# EAGLE board rele (EAGLE 5.06)
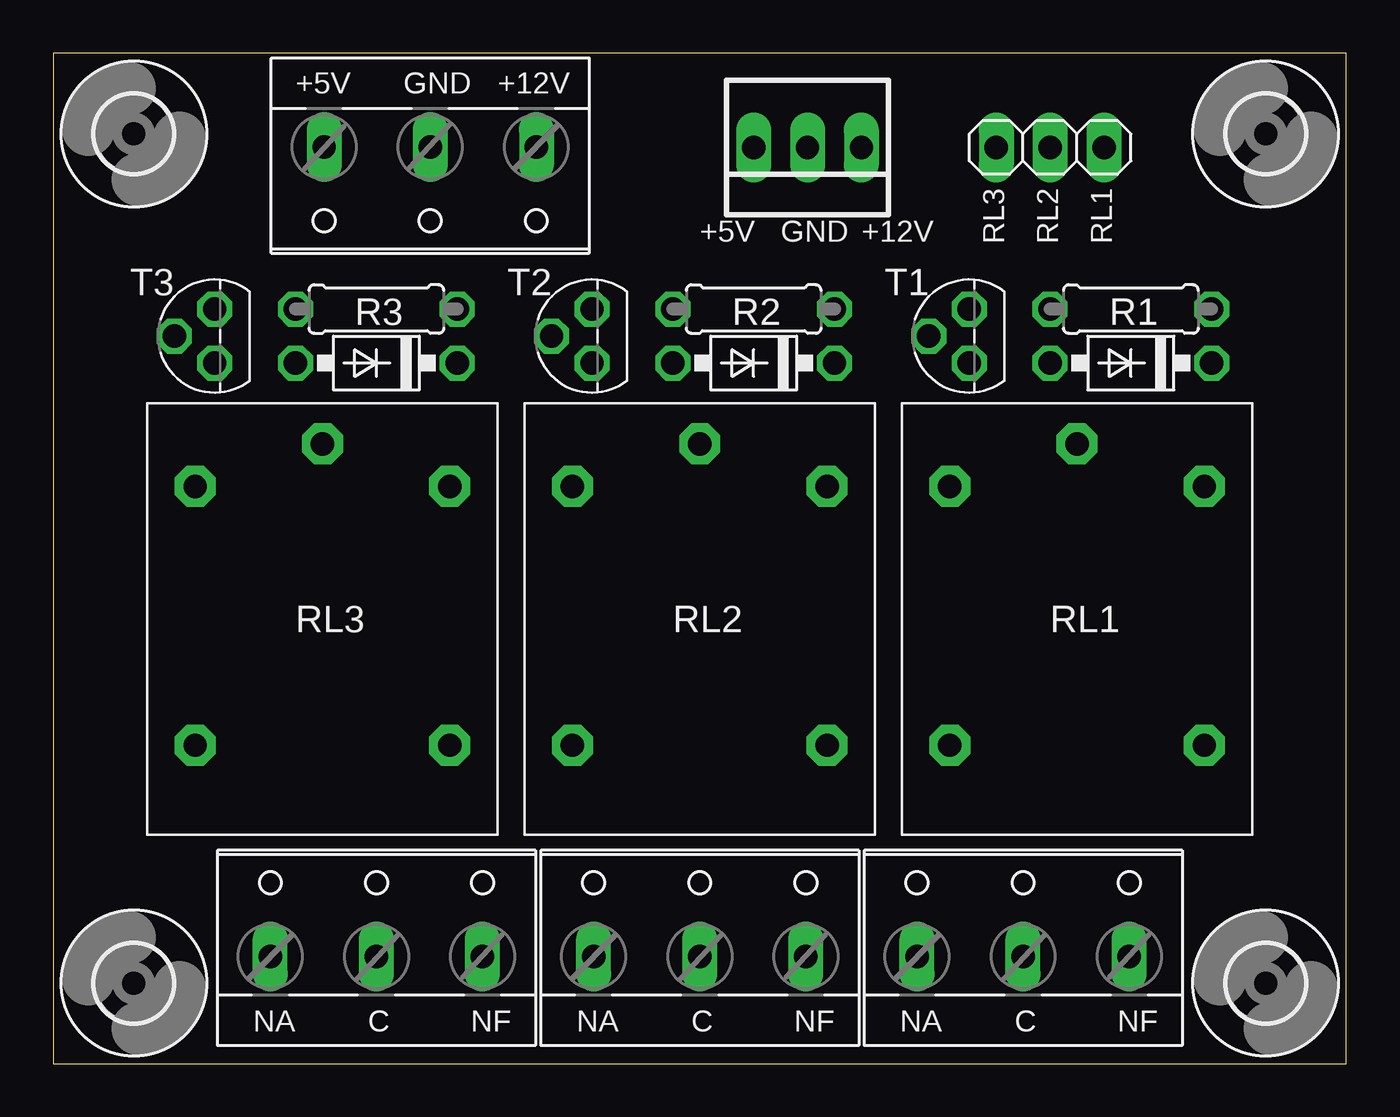
[diagram p0: board, top side]
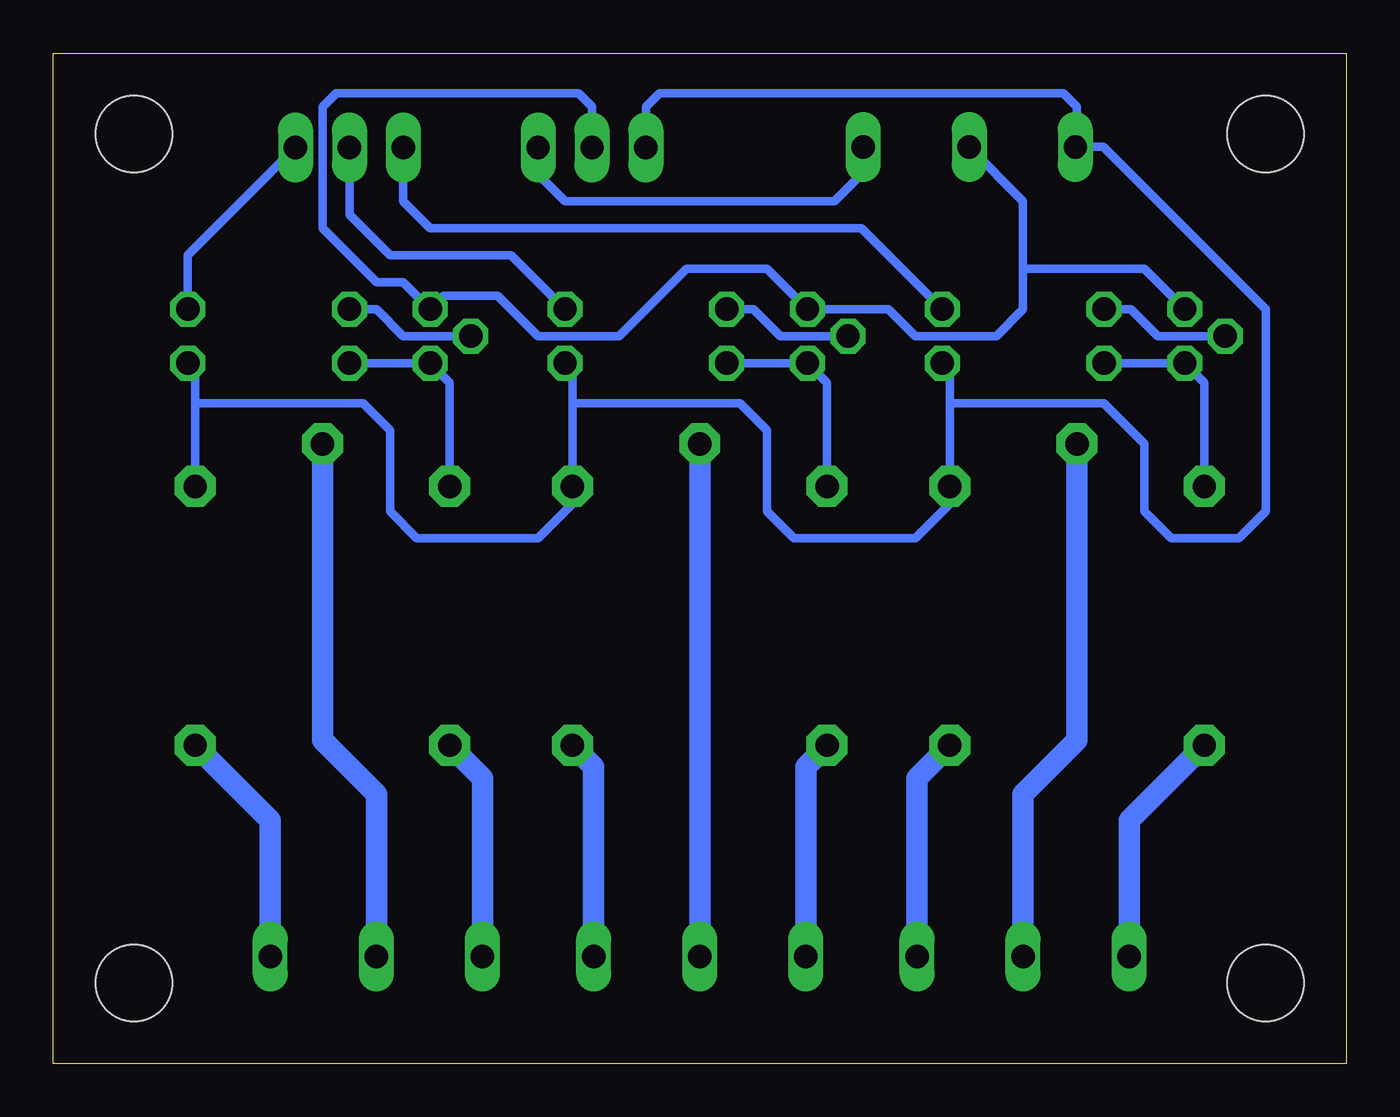
[diagram p1: board, bottom side, seen from below]

Size 60.96 x 47.62 mm. Coordinates in mm from the lower left corner, seen from the top.
Outline: 0,0 60.96,0 60.96,47.62 0,47.62 0,0
Copper layers (1*16): Top 0.035mm / dielectric 1.5mm / Bottom 0.035mm
Design rules "default": minimum track width 10mil, minimum drill 24mil, track to track 8mil, track to pad 8mil, pad to pad 8mil, via to via 8mil, smd to smd 8mil, copper to edge 40mil, drill to drill 8mil, minimum pad ring 10mil, minimum via ring 8mil, stop-mask expansion 4mil, vias tented up to drill 0mil, thermal gap 10mil

## Footprints (pad centres in the part's own frame; a part is rotated, then mirrored left to right if it is on the bottom)
DO41-10 = drill 1.1 octagon: A 3.81,0; C -3.81,0
1X03 = drill 1.1 long: 1 -2.54,0; 2 0,0; 3 2.54,0
0207/7 = drill 1.1 octagon: 1 -3.81,0; 2 3.81,0
AT = drill 1.1 pad 1.93 octagon: B1 -6.89,6; B2 -6.89,-6; C -8.89,0; NA 5.31,-6; NF 5.31,6
TO92 = drill 1.1 octagon: 1 1.27,0; 2 0,1.905; 3 -1.27,0
3,6 = hole 3.6: 0,0
W237-103 = drill 1.1 long: 1 -5,-1.29; 2 0,-1.29; 3 5,-1.29
22-23-2031 = drill 1.1 long: 1 -2.54,0; 2 0,0; 3 2.54,0

## Placement (x,y rotation side)
D1  1N4004A  [DO41-10]  50.8,33.02 180 top
D2  1N4004A  [DO41-10]  33.02,33.02 180 top
D3  1N4004A  [DO41-10]  15.24,33.02 180 top
JP4  [1X03]  46.99,43.18 180 top
R1  [0207/7]  50.8,35.56 180 top
R2  [0207/7]  33.02,35.56 180 top
R3  [0207/7]  15.24,35.56 180 top
RL1  AT  [AT]  48.26,20.32 270 top
RL2  AT  [AT]  30.48,20.32 270 top
RL3  AT  [AT]  12.7,20.32 270 top
T1  BC547  [TO92]  43.18,34.29 90 top
T2  BC547  [TO92]  25.4,34.29 90 top
T3  BC547  [TO92]  7.62,34.29 90 top
U$1  [3,6]  3.81,43.81 270 top
U$2  [3,6]  57.15,43.81 270 top
U$3  [3,6]  57.15,3.81 270 top
U$4  [3,6]  3.81,3.81 270 top
X1  [W237-103]  45.72,6.35 0 top
X2  [W237-103]  30.48,6.35 0 top
X3  [W237-103]  15.24,6.35 0 top
X4  [W237-103]  17.78,41.91 180 top
X5  22-23-2031  [22-23-2031]  35.56,43.18 180 top

## Library data of the parts
D1-D3 JP4 R1-R3 RL1-RL3 T1-T3 U$1-U$4 X1-X5 = caixa

## Nets
+5V: D1.C D2.C D3.C RL1.B1 RL2.B1 RL3.B1 X4.3 X5.3
+12V: X4.1 X5.1
GND: T1.1 T2.1 T3.1 X4.2 X5.2
N$1: R1.2 T1.2
N$2: D1.A RL1.B2 T1.3
N$3: RL1.NA X1.1
N$4: RL1.NF X1.3
N$5: R2.2 T2.2
N$6: D2.A RL2.B2 T2.3
N$7: RL2.NA X2.1
N$8: RL2.NF X2.3
N$9: RL3.NA X3.1
N$10: R3.2 T3.2
N$11: D3.A RL3.B2 T3.3
N$12: RL3.NF X3.3
N$13: RL1.C X1.2
N$14: RL2.C X2.2
N$15: RL3.C X3.2
RELE_1: JP4.1 R1.1
RELE_2: JP4.2 R2.1
RELE_3: JP4.3 R3.1

## Tracks (layer width: path | path; a pad name or v marks a point on that pad's centre or on a via)
+5V
  Bottom 0.254: X4.3 12.7,43.18
  Bottom 0.406: D3.C 18.7,32.67 18.7,31.11 | 18.7,31.11 RL3.B1 18.7,26.39 20.32,24.77 26.04,24.77 27.3,26.04 27.3,29.84 28.57,31.11 36.48,31.11 | D2.C 36.48,32.67 36.48,31.11 | 36.48,31.11 RL2.B1 36.48,26.39 38.1,24.77 43.81,24.77 45.09,26.04 45.09,29.84 46.35,31.11 54.26,31.11 | D1.C 54.26,32.67 54.26,31.11 | 54.26,31.11 RL1.B1 | 18.7,31.11 11.43,31.11 9.53,29.21 9.53,26.04 8.26,24.77 5.08,24.77 3.81,26.04 3.81,35.56 11.45,43.2 X4.3 12.7,43.28 12.7,45.09 13.34,45.72 32.38,45.72 33.02,45.09 X5.3
+12V
  Bottom 0.406: X5.1 38.1,41.91 36.83,40.64 24.13,40.64 22.86,41.91 22.86,43.12 X4.1
GND
  Bottom 0.406: X5.2 35.56,45.09 36.2,45.72 47.62,45.72 48.26,45.09 48.26,39.37 45.72,36.83 44.45,36.83 T1.1 42.55,36.2 40.01,36.2 38.1,34.29 34.29,34.29 31.11,37.47 27.3,37.47 T2.1 21.59,35.56 20.32,34.29 16.51,34.29 15.24,35.56 15.24,37.47 | T3.1 9.53,37.47 15.24,37.47 | X4.2 17.78,43.18 15.24,40.64 15.24,37.47
N$1
  Bottom 0.406: T1.2 44.45,34.29 45.72,35.56 R1.2
N$2
  Bottom 0.406: RL1.B2 42.26,32.1 T1.3 D1.A
N$3
  Bottom 1.016: RL1.NA 40.72,13.47 X1.1
N$4
  Bottom 1.016: RL1.NF 50.72,11.47 X1.3
N$5
  Bottom 0.406: T2.2 26.67,34.29 27.94,35.56 R2.2
N$6
  Bottom 0.406: D2.A T2.3 24.48,32.1 RL2.B2
N$7
  Bottom 1.016: RL2.NA 25.48,14.01 X2.1
N$8
  Bottom 1.016: RL2.NF 35.48,14.01 X2.3
N$9
  Bottom 1.016: RL3.NA 10.24,11.47 X3.1
N$10
  Bottom 0.406: T3.2 8.89,34.29 10.16,35.56 R3.2
N$11
  Bottom 0.406: RL3.B2 6.7,32.1 T3.3 D3.A
N$12
  Bottom 1.016: RL3.NF 20.24,13.47 X3.3
N$13
  Bottom 1.016: RL1.C 48.26,15.24 45.72,12.7 X1.2
N$14
  Bottom 1.016: X2.2 RL2.C
N$15
  Bottom 1.016: RL3.C 12.7,15.24 15.24,12.7 X3.2
RELE_1
  Bottom 0.406: JP4.1 54.61,38.1 R1.1
RELE_2
  Bottom 0.406: R2.1 39.37,38.1 45.09,38.1 46.99,40.01 JP4.2
RELE_3
  Bottom 0.406: JP4.3 44.45,40.64 43.18,39.37 22.86,39.37 R3.1

## Text on the board
tNames: +5V | GND | +12V | RL3 | RL2 | RL1 | +5V | GND | +12V | NA | C | NF | NA | C | NF | NA | C | NF